# Altium PCB Layout.PcbDoc
Units mm, origin at the board's own origin, x right, y up, seen from the top; angles counter-clockwise.
Board outline 97.54 x 97.92 mm, 2 copper layers (Top Layer, Bottom Layer); 53 components, 56 nets, 252 pads, 25 vias.
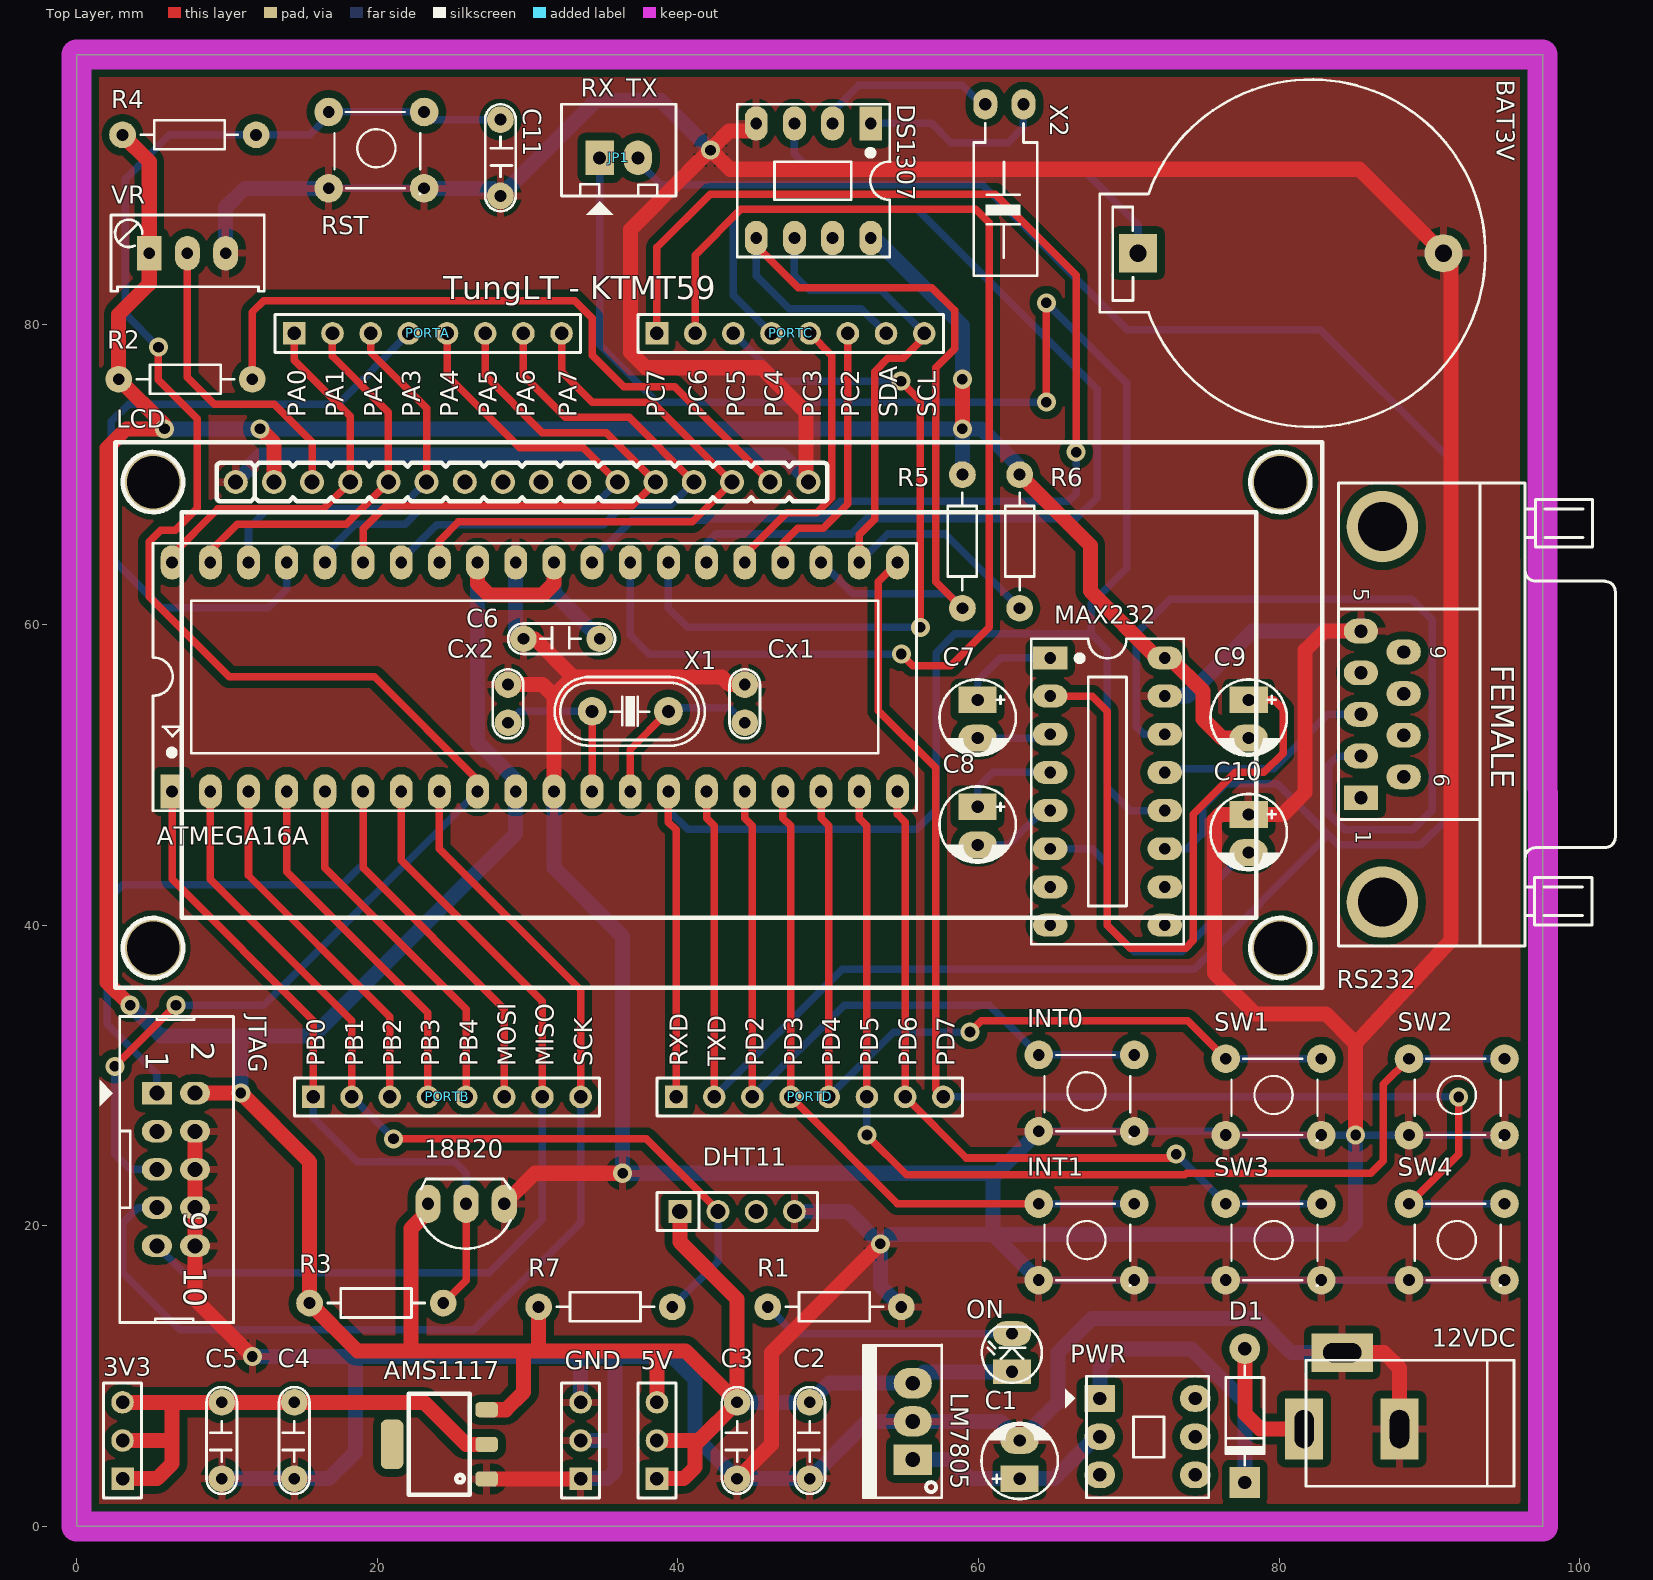
[diagram p0: Top Layer view]
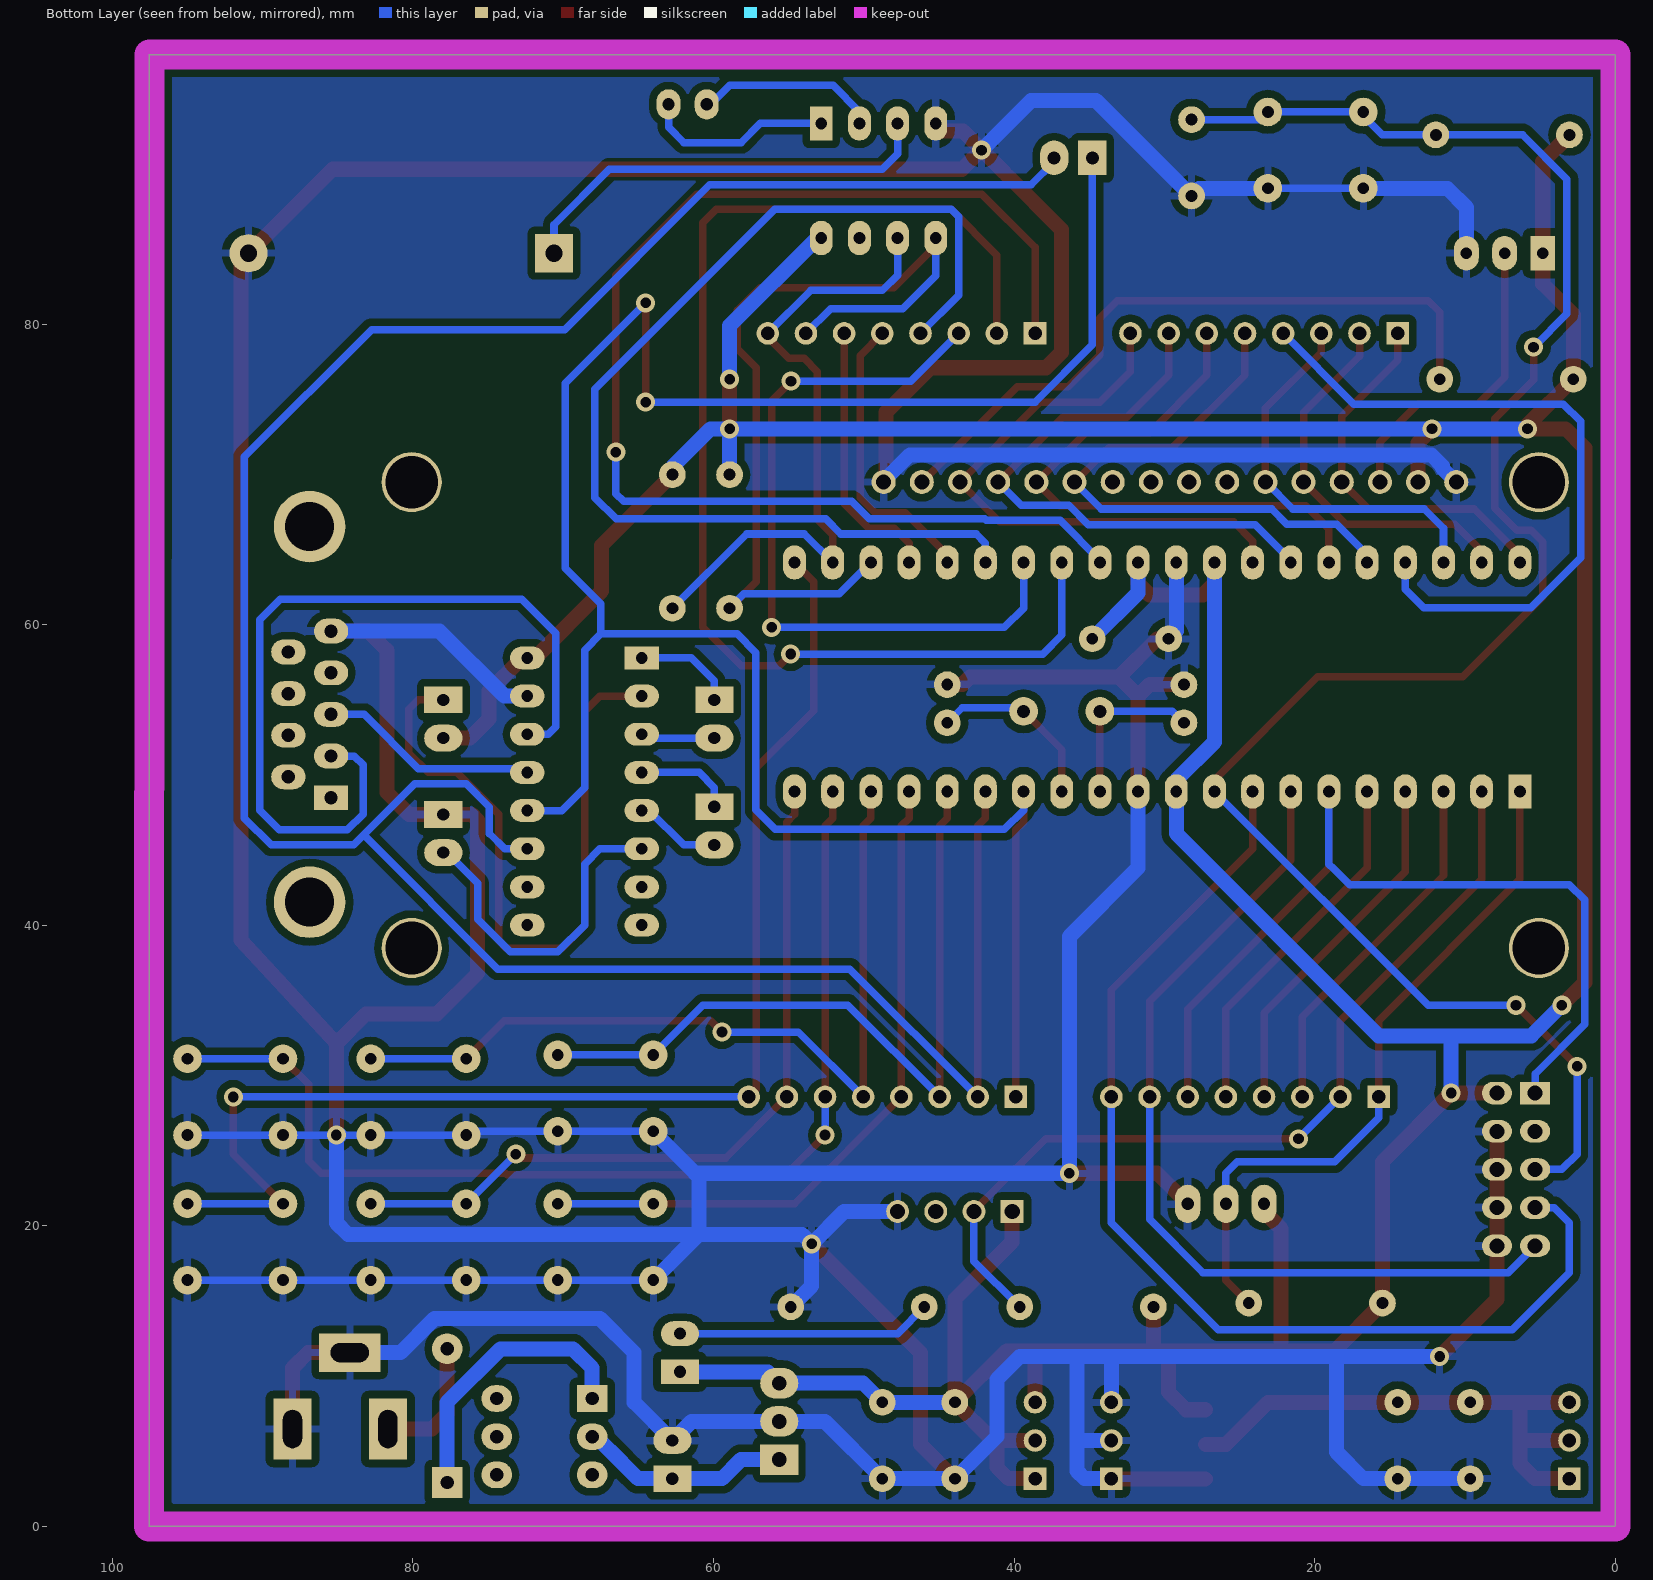
[diagram p1: Bottom Layer view, seen from below]
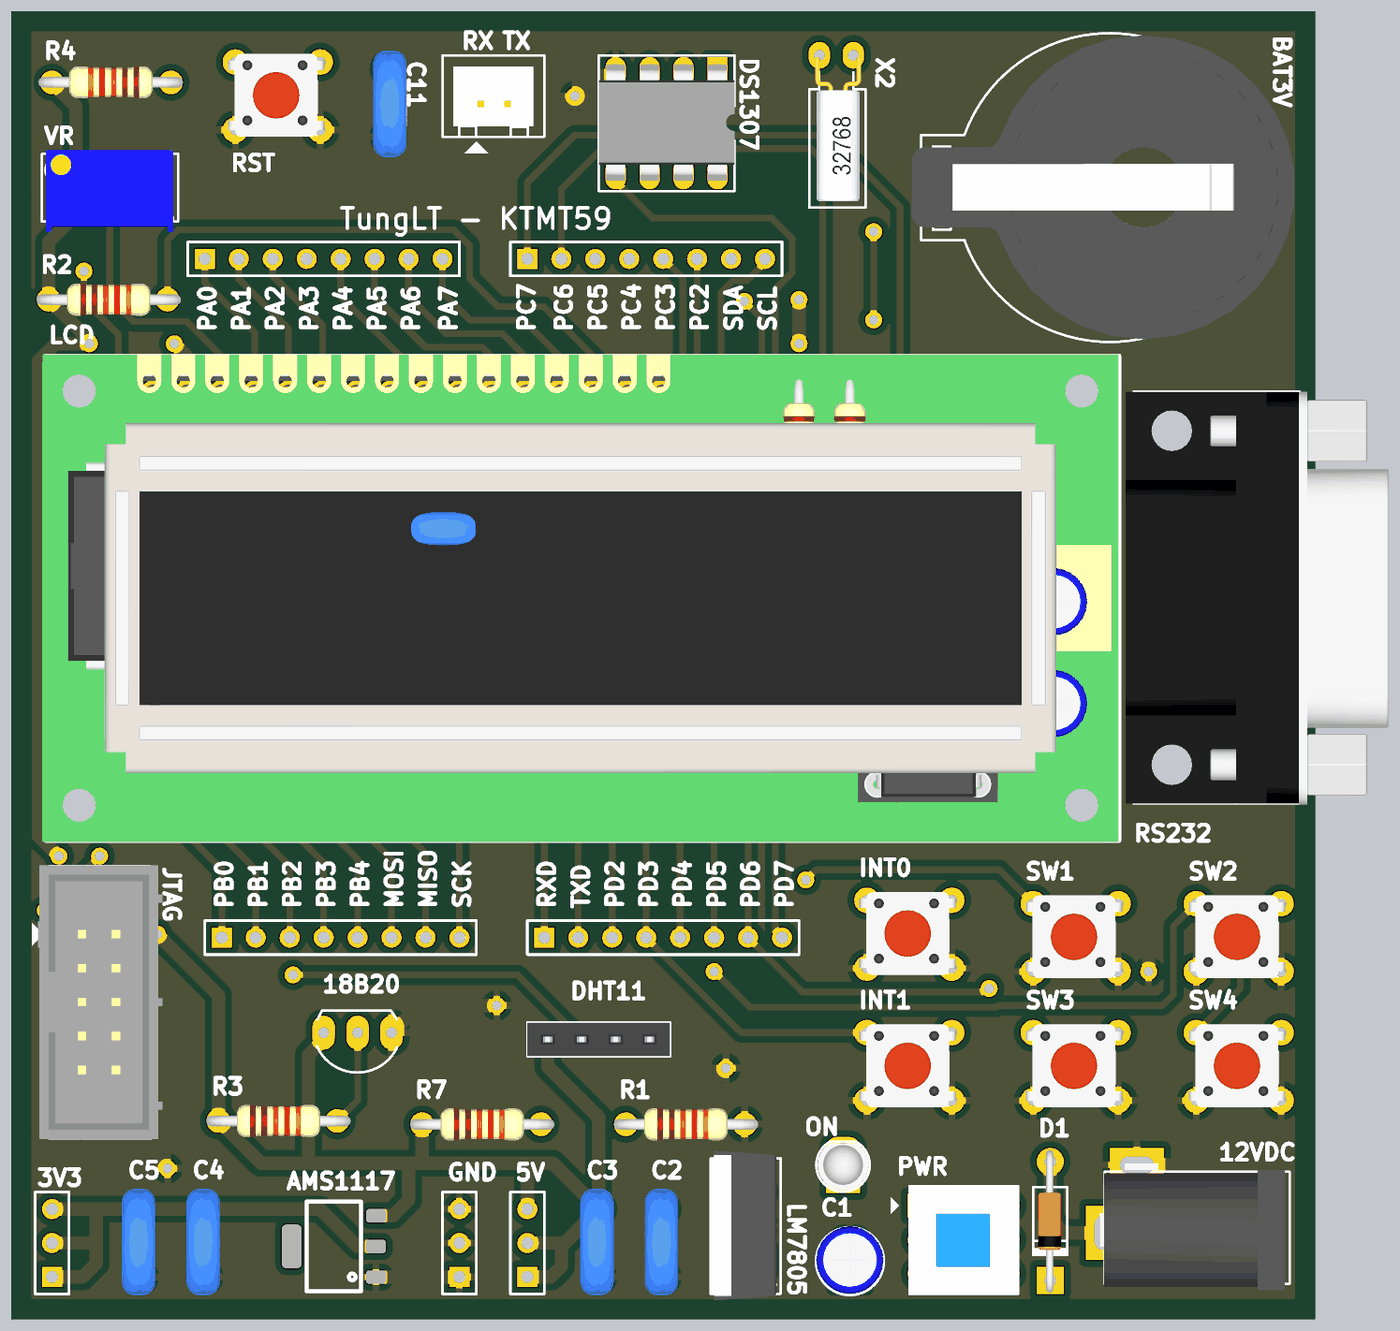
[diagram p2: 3D render of the assembled board from above, using the file's embedded part models]

## Layer stack, top to bottom
Top Solder: solder mask 0.0102, Solder Resist, Dk 3.5
Top Layer: signal copper 0.0356
Dielectric 1: dielectric 0.32, FR-4, Dk 4.8
Bottom Layer: signal copper 0.0356
Bottom Solder: solder mask 0.0102, Solder Resist, Dk 3.5

## Board outline
0,0 0,97.917 97.534,97.917 97.544,0

## Design rules (kind name [scope] priority, off if disabled: settings)
Clearance [All] p1: gap=0.5 ignorepadtopadclearanceinfootprint=FALSE
PlaneClearance [All] p1: clearance=0.5
PlaneConnect [All] p1: planeconnectstyle=Relief reliefexpansion=0.5 reliefentries=4 reliefconductorwidth=0.5 reliefairgap=0.5
PolygonConnect [All] p1: connectstyle=Relief reliefconductorwidth=0.5 reliefentries=4 polygonreliefangle="90 Angle" airgapwidth=0.5
RoutingVias [All] p1: holewidth=0.711 width=1.27 viastyle="Through Hole" minholewidth=0.711 minwidth=1.27 maxholewidth=0.711 maxwidth=1.27
SolderMaskExpansion [All] p1: expansion=0.102
Width Net_Signal [InNetClass('Net_Signal')] p1: maxlimit=1 minlimit=0.5 preferedwidth=0.5
Width Net_Power [InNetClass('Net_Power')] p2: maxlimit=2 minlimit=0.5 preferedwidth=1
28 further rules are at their usual default settings.

## Classes and differential pairs
component class Schematic: 3V3 12VDC 18B20 AMS1117 ATMEGA16A BAT3V C1 C2 C3 C4 C5 C6 C7 C8 C9 C10 C11 Cx1 Cx2 D1 DHT11 INT0 INT1 JP1 JTAG LCD LM7805 MAX232 ON PORTA PORTB PORTC PORTD PWR R1 R2 R3 R4 R5 R6 R7 RS232 RST SW1 SW2 SW3 SW4 VR X1 X2
net class Net_Power: 3V3 GND VCC
net class Net_Signal: MISO MOSI Net12VDC_1 NetBAT3V_1 NetC1_1 NetC7_1 NetC7_2 NetC8_1 NetC8_2 NetC9_1 NetC10_2 NetD1_2 NetDS1307_1 NetDS1307_2 NetLCD_3 NetLCD_15 NetMAX232_13 NetMAX232_14 NetON_2 PA0 PA1 PA2 PA3 PA4 PA5 PA6 PA7 PB0 PB1 PB2 PB3 PB4 PC2 PC3 PC4 PC5 PC6 PC7 PD2 PD3 PD4 PD5 PD6 PD7 RESET RXD SCK SCL SDA TXD XTAL1 XTAL2

## Components (designator, comment, footprint, x,y, rotation, side; value= is the part's Value field where it differs from the comment)
3V3 "Header 3" HDR1X3 3.048,3.175 r90 top
5V "Header 3" HDR1X3 38.608,3.175 r90 top
12VDC "Jac DC" DC-IN 84.836,9.017 r180 top
18B20 "DS18B20" DS18S20 25.908,21.463 r180 top
AMS1117 "AMS1117-3V3" AMS1117-3.3V 24.13,5.461 r180 top
ATMEGA16A "ATMEL 16A" DIP40/W0.6 6.35,48.895 r0 top value="Atmega 16L"
BAT3V "PIN 3V" PIN3V 70.612,84.709 r0 top (schematic designator BT1)
C1 "100uF" CP1/2 62.738,3.175 r90 top value=10uF/50V
C2 "106" CN2 48.768,3.175 r90 top value=0.1uF
C3 "104" CN2 43.942,3.175 r90 top value=0.1uF
C4 "106" CN2 14.478,3.175 r90 top value=0.1uF
C5 "104" CN2 9.652,3.175 r90 top value=0.1uF
C6 "104" CN2 29.718,59.055 r0 top value=0,1uF/300V
C7 "1uF" CP1/2 59.944,54.991 r270 top value=10uF/50V
C8 "1uF" CP1/2 59.944,47.879 r270 top value=10uF/50V
C9 "1uF" CP1/2 77.978,54.991 r270 top value=10uF/50V
C10 "1uF" CP1/2 77.978,47.371 r270 top value=10uF/50V
C11 "104" CN2 28.194,93.599 r270 top value=0.1uF
Cx1 "22pF" CN1 44.45,56.007 r270 top value=33pF
Cx2 "22pF" CN1 28.702,56.007 r270 top value=33pF
D1 "1N4007" D1A 77.724,11.811 r90 top
DHT11 "DHT11" JP4-C1T 40.132,20.955 r0 top
DS1307 "DS1307" DIP8/W0.3 52.832,93.345 r180 top
GND "Header 3" HDR1X3 33.528,3.175 r90 top
INT0 "SW" SW4 64.008,31.369 r0 top value="Button chip 4 pin"
INT1 "SW" SW4 64.008,21.463 r0 top value="Button chip 4 pin"
JP1 "JP2" CON2 34.798,91.059 r0 top value="Connector 2"
JTAG "Header 5x2" Hed2X5 5.334,28.829 r270 top
LCD "LCD 16x2A" LCD16x2 10.58,69.481 r0 top value=LCD16x2A
LM7805 "LM7805" QTO-220 55.626,4.445 r90 top
MAX232 "MAX232" DIP16/W0.3 64.77,57.785 r270 top
ON "LED" LED-3 62.23,10.287 r90 top value="LED 3 ly Single Colour"
PORTA "Header 8" HDR1X8 14.478,79.375 r0 top
PORTB "Header 8" HDR1X8 15.748,28.575 r0 top
PORTC "Header 8" HDR1X8 38.608,79.375 r0 top
PORTD "Header 8" HDR1X8 39.878,28.575 r0 top
PWR "SW6S" SW6 68.072,8.509 r0 top value=SW6
R1 "220" R1/4W 54.864,14.605 r180 top value="R1/4W - 1K"
R2 "220" R1/4W 11.684,76.327 r180 top value="R1/4W - 1K"
R3 "10k" R1/4W 24.384,14.859 r180 top value="R1/4W - 1K"
R4 "100k" R1/4W 3.048,92.583 r0 top value="R1/4W - 1K"
R5 "10k" R1/4W 58.928,61.087 r90 top value="R1/4W - 1K"
R6 "10k" R1/4W 62.738,61.087 r90 top value="R1/4W - 1K"
R7 "10k" R1/4W 39.624,14.605 r180 top value="R1/4W - 1K" (schematic designator R17)
RS232 "RS232" "DSB 9-M" 86.868,54.024 r90 top
RST "SW" SW4 16.764,94.107 r0 top value="Button chip 4 pin"
SW1 "SW" SW4 76.454,31.115 r0 top value="Button chip 4 pin"
SW2 "SW" SW4 88.646,31.115 r0 top value="Button chip 4 pin"
SW3 "SW" SW4 76.454,21.463 r0 top value="Button chip 4 pin"
SW4 "SW" SW4 88.646,21.463 r0 top value="Button chip 4 pin"
VR "10K" VR1 4.826,84.709 r0 top value="VR 10K"
X1 "16MHz" XT2 36.83,54.229 r0 top value=4Mhz
X2 "32,768 Khz" XT32-2 62.992,94.615 r270 top value=32,768khz

## Footprints (in the part's own frame and the unit in brackets; to place one, negate y for a bottom-side part, rotate by r counter-clockwise, add the part's x,y. Pads: shape width x height; smd on the part's side, far side on the other; paste and mask are expansions set on the pad)
AMS1117-3.3V [mm] "SOT223, 4-Leads, Body 6.7x7.3mm (max), Pitch 2.30mm, IPC Medium Density"
  rrect50% 1.5x1 smd: 1(-3.15,2.3) 2(-3.15,0) 3(-3.15,-2.3)
  rrect50% 1.5x3.28 smd: 4(3.15,0)
  silkscreen extent -2.03,-3.35 2.03,3.35
CN1 [mil]
  round 70 hole 31: 1(0,0) 2(100,0)
  silkscreen extent -40,-40 141,40, body extent -60,-30 170,37, height 265
CN2 [mil]
  round 70 hole 31: 1(0,0) 2(200,0)
  silkscreen extent -40,-40 240,40, body extent -54,-44 260,55, height 407
CON2 [mil] "CON2"
  rect 75x90 hole 34: 1(0,0)
  oval 75x90 hole 34: 2(100,0)
  silkscreen extent -100,-150 200,140, body extent -68,-70 168,107, height 236
CP1/2 [mil] "Tu hoa < 22uF/16>50V"
  rect 70x100 hole 32: 1(0,0)
  oval 70x100 hole 32: 2(100,0)
  silkscreen extent -53,-100 146,100, body extent -49,-99 149,99, height 287
D1A [mil] "Diode 1A, W 100mil, L 350mil"
  round 80 hole 35: 1(0,0)
  rect 80x80 hole 35: 2(-350,0)
  silkscreen extent -305,-50 -45,50, body extent -386,-33 34,36, height 84
DC-IN [mil] "Jac DC input"
  rect 100x160 hole 50 slot 100 at 90 deg: 1(125,100) 2(-125,100)
  rect 160x100 hole 50 slot 100 at 0 deg: 3(25,-100)
  silkscreen extent -425,-80 120,250, body extent -410,-105 134,269, height 434
DIP8/W0.3 [mil] "8 PIN, W 300mil, Pin to pin 100mil"
  rect 60x90 hole 31: 1(0,0)
  oval 60x90 hole 31: 2(100,0) 3(200,0) 4(300,0) 5(300,300) 6(200,300) 7(100,300) 8(0,300)
  silkscreen extent -50,-50 350,350, body extent -50,-40 350,336, height 201
DIP16/W0.3 [mil] "16 PIN, W 300mil, Pin to pin 100mil"
  rect 60x90 hole 31: 1(0,0)
  oval 60x90 hole 31: 2(100,0) 3(200,0) 4(300,0) 5(400,0) 6(500,0) 7(600,0) 8(700,0) 9(700,300) 10(600,300) 11(500,300) 12(400,300) 13(300,300) 14(200,300) 15(100,300) 16(0,300)
  silkscreen extent -50,-50 750,350, body extent -52,-57 752,356, height 299
DIP40/W0.6 [mil] "40 PIN, W 600mil, Pin to pin 100mil"
  rect 60x90 hole 31: 1(0,0)
  oval 60x90 hole 31: 2(100,0) 3(200,0) 4(300,0) 5(400,0) 6(500,0) 7(600,0) 8(700,0) 9(800,0) 10(900,0) 11(1000,0) 12(1100,0) 13(1200,0) 14(1300,0) 15(1400,0) 16(1500,0) 17(1600,0) 18(1700,0) 19(1800,0) 20(1900,0) 21(1900,600) 22(1800,600) 23(1700,600) 24(1600,600) 25(1500,600) 26(1400,600) 27(1300,600) 28(1200,600) 29(1100,600) 30(1000,600) 31(900,600) 32(800,600) 33(700,600) 34(600,600) 35(500,600) 36(400,600) 37(300,600) 38(200,600) 39(100,600) 40(0,600)
  silkscreen extent -50,-50 1950,650, body extent -82,-10 1982,600, height 224
DS18S20 [mil] "TO-92"
  oval 66x100 hole 32: 3(100,0) 4(0,0) 5(-100,0)
  silkscreen extent -117,-65 120,118
"DSB 9-M" [mil] "COM MALE D Subminiature; 9 Position; Right Angle; Pitch 1.385 mm"
  rect 65x90 hole 35: 1(-218.11,55.91)
  oval 65x90 hole 35: 2(-109.06,55.91) 3(0,55.91) 4(109.05,55.91) 5(218.11,55.91) 6(-163.58,-55.91) 7(-54.53,-55.91) 8(54.53,-55.91) 9(163.58,-55.91)
  round 187.4 hole 128.35: 10(491.93,0) 11(-491.93,0)
  silkscreen extent -606,-610 606,114, body extent -610,-637 606,138, height 495
HDR1X3 [mm] "Connector; Header; 3 Position"
  rect 1.5x1.5 hole 0.9: 1(0,0)
  round 1.5 hole 0.9: 2(2.54,0) 3(5.08,0)
  silkscreen extent -1.27,-1.27 6.35,1.27
HDR1X8 [mm] "Connector; Header; 8 Position"
  rect 1.5x1.5 hole 0.9: 1(0,0)
  round 1.5 hole 0.9: 2(2.54,0) 3(5.08,0) 4(7.62,0) 5(10.16,0) 6(12.7,0) 7(15.24,0) 8(17.78,0)
  silkscreen extent -1.27,-1.27 19.05,1.27
Hed2X5 [mm] "Header 10x2,20 pin, connecter"
  rect 1.5x2 hole 1: 1(0,0)
  oval 1.5x2 hole 1: 2(0,2.54) 3(2.54,0) 4(2.54,2.54) 5(5.08,0) 6(5.08,2.54) 7(7.62,0) 8(7.62,2.54) 9(10.16,0) 10(10.16,2.54)
  silkscreen extent -5.1,-3.81 15.29,5.11, body extent -5.17,-3.33 15.33,5.97, height 8.82
JP4-C1T [mm] "4 row, straight, gold plating"
  rect 1.52x1.52 hole 1.02: 1(0,0)
  round 1.52 hole 1.02: 2(2.54,0) 3(5.08,0) 4(7.62,0)
  silkscreen extent -1.52,-1.27 9.14,1.27, body extent -1.52,-1.25 9.14,1.25, height 8.51
LCD16x2 [mm] "LCD 16x2, 36.3mmx80.3mm"
  round 1.6 hole 1 mask+0.1: 1(0,0) 2(2.54,0) 3(5.08,0) 4(7.62,0) 5(10.16,0) 6(12.7,0) 7(15.24,0) 8(17.78,0) 9(20.32,0) 10(22.86,0) 11(25.4,0) 12(27.94,0) 13(30.48,0) 14(33.02,0) 15(35.56,0) 16(38.1,0)
  round 4 hole 3.5: Hole_0(-5.5,0) Hole_1(-5.5,-31) Hole_3(69.5,-31) Hole_4(69.5,0)
  silkscreen extent -8,-33.65 72.3,2.65, body extent -8.25,-33.75 72.25,2.75, height 10.52
LED-3 [mil] "LED 2 PIN, 3ly Only colour"
  rect 65x100 hole 32: 1(0,0)
  oval 65x100 hole 32: 2(100,0)
  silkscreen extent -29,-78 118,79, body extent -25,-75 113,75, height 217
PIN3V [mil] "Socket PIN 3V"
  rect 100x100 hole 45: 1(0,0)
  round 100 hole 45: 2(800,0)
  silkscreen extent -100,-455 910,455, body extent -128,-447 1002,449, height 278
QTO-220 [mil] "TO-220 - 1-2-3"
  rect 80x100 hole 39: 1(0,0)
  oval 80x100 hole 39: 2(100,0) 3(200,0)
  silkscreen extent -100,-76 300,130, body extent -119,-64 322,121, height 755
R1/4W [mil] "R 1/4W, 2 Pin, 350mil"
  round 70 hole 31: 1(0,0) 2(350,0)
  silkscreen extent 48,-38 302,38, body extent -40,-47 386,47, height 111
SW4 [mil] "SW button 4pin, 250 x250 mil"
  round 75 hole 31: 1(0,0) 2(250,-200) 3(250,0) 4(0,-200)
  silkscreen extent 15,-215 240,0, body extent -36,-220 276,24, height 276
SW6 [mil] "SW DTDP - 6Pin 260x300x300 mil"
  rect 80x70 hole 35: 1(0,0)
  oval 80x70 hole 35: 2(0,-100) 3(0,-200) 4(250,-200) 5(250,-100) 6(250,0)
  silkscreen extent -90,-260 285,58, body extent -33,-259 281,55, height 532
VR1 [mil] "Variable Resistor"
  rect 65x90 hole 30: 1(0,0)
  oval 65x90 hole 30: 2(100,0) 3(200,0)
  silkscreen extent -100,-100 301,100, body extent -88,-130 288,110, height 455
XT2 [mil] "Footpin for Crystal 2 pin"
  round 75 hole 34: 1(-100,0) 2(100,0)
  silkscreen extent -198,-90 195,90, body extent -233,-93 213,90, height 138
XT32-2 [mm] "Crystal 32k, 2 pin, real timer for DS1307"
  oval 2x1.6 hole 0.813: 1(0,0) 2(0,-2.54)
  silkscreen extent 1.27,-3.3 11.4,0.91, body extent 0.15,-2.87 10.92,0.58, height 3.4

## Part data
3V3 5V GND: library part Hed3, "Header 3 (Green)"
12VDC: library part DCIN, "Jac DC input"
18B20: library part DS18S20, "High Precision  1-Wire® Digital Thermometer"
AMS1117: "Linear Voltage Regulator 3.3V 1A 15V Max SOT-223", ComponentLink1Description=Datasheet, ComponentLink1URL="D:\Dropbox\Datasheets\Power Management ICs\Linear Regulators\AMS1117.pdf", Unit Price=0.2000
ATMEGA16A: library part ATmega16A-PU, "8-Bit AVR Microcontroller with 16K Bytes of In-System Programmable Flash Memory"
BAT3V: "Battery 3VDC"
C1 C7 C8 C9 C10: library part CP1, "Cap P  0,1uF < 22uF , 16 - 50V", Description 1="10 => 220uF/6,3V/10V - 10uF => 100uF/16V", Description 2="0,1uF => 33uF/50V - 10uF => 22uF/63V", Description 3="0,47uF => 10uF/100V"
C2 C3 C4 C5 C11: library part CN2, "Cap np 104 => 105pF"
C6: library part CN, Designed by=VanDungEvn
Cx1 Cx2: library part CN0, "Cremic For Xtal 1pF => 100pF"
D1: library part D1A, "Diode 1A"
DHT11: Manufacturer="Würth Elektronik eiSos GmbH", partNo=613004143121, ComponentLink1 Description=Manufacturer, ComponentLink1URL=http://www.we-online.com, ComponentLink2 Description=Datasheet, ComponentLink2URL=http://katalog.we-online.de/em/datasheet/6130xx143121.pdf, Created by="Karrer Zheng", Created Date="29 March 2013", NoPins=04
DS1307: "Real Timer Serial"
INT0 INT1 RST SW1 SW2 SW3 SW4: library part SW4, "Switch button 4 pin"
JP1: library part Con2, "Connector 2"
JTAG: library part HED5x2
LCD: library part LCD16x2A, "LCD dipslay 16 char, 2 line"
LM7805: library part LM78xx, "On ap +, from + 5 to + 24VDC", =LM7808
MAX232: "Dual EIA-232 Driver/Receiver"
ON: "LED Single colour Green and Red"
PORTA PORTB PORTC PORTD: library part HED8V, "Header 8 Vit Broad"
PWR: "SW-DTDP - 6 Pin"
R1 R2 R3 R4 R5 R6 R7: library part R1/4W, "Resistor 1/4W"
RS232: library part COM
VR: library part VR, "Var Resistor"
X1: library part XT2, "Crystal For all Crystal 2pin."
X2: library part XT32k, "Crystal 32,768kHz for timer real"

## Via types
v1: diameter 1.27, hole 0.711, Top Layer to Bottom Layer, 25 vias

## Nets (pads, with @x,y where several pads share a name; then routed paths per layer and width w, separated by ;. In a path a pad name is that pad's centre, name@x,y a point inside that pad or via, vN(x,y) a via of type N, cw(c..) or ccw(c..) an arc to the next point about the centre after c; other vN are vias at no path point)
3V3: 3V3.1 3V3.2 3V3.3 AMS1117.2 C4.2 C5.2 | length 36.5
  Top Layer w1: 3V3.1 5.334,3.175 6.35,4.191 6.35,5.715 ; 3V3.2 6.35,5.715 ; 3V3.3 6.35,8.255 ; AMS1117.2 25.908,5.461 23.114,8.255 C4.2 C5.2 6.35,8.255 ; 6.35,5.715 6.35,8.255
GND: 12VDC.2 12VDC.3 18B20.5 AMS1117.1 ATMEGA16A.11 ATMEGA16A.31 BAT3V.2 C1.2 C2.1 C3.1 C4.1 C5.1 C6.1 C10.1 C11.2 Cx1.1 Cx2.1 DHT11.4 DS1307.4 GND.1 GND.2 GND.3 INT0.2 INT0.4 INT1.2 INT1.4 JTAG.4 JTAG.6 JTAG.8 JTAG.10 LCD.1 LCD.16 LM7805.2 MAX232.15 R1.1 RS232.5 RST.2 RST.4 SW1.2 SW1.4 SW2.2 SW2.4 SW3.2 SW3.4 SW4.2 SW4.4 VR.3 | length 674.8
  Top Layer w1: JTAG.4 JTAG.6 JTAG.8 JTAG.10 7.874,15.113 v1(11.684,11.303) ; AMS1117.1 33.514,3.161 GND.1 ; 18B20.5 30.48,23.495 v1(36.322,23.495) ; Cx2.1 30.988,56.007 31.75,55.245 ; C6.1 30.48,59.055 33.02,56.515 ; ATMEGA16A.11 31.75,55.245 ; 40.458,89.891 36.855,86.288 36.855,78.105 37.871,77.089 45.554,77.089 48.514,74.129 48.514,69.647 LCD.16 ; 40.64,90.073 v1@42.164,91.597 ; C3.1 46.228,5.461 46.228,11.557 v1(53.467,18.796) ; Cx1.1 43.434,56.007 42.926,56.515 33.02,56.515 ; DS1307.4 45.212,92.837 43.404,92.837 v1@42.164,91.597 ; 12VDC.3 86.995,11.557 88.011,10.541 12VDC.2 ; v1(85.09,26.035) 85.09,32.131 ; RS232.5@86.03,59.564 RS232.5 83.008,59.564 81.737,58.293 81.737,48.844 80.264,47.371 C10.1 76.073,47.371 75.692,46.99 75.692,36.805 78.41,34.087 83.134,34.087 85.09,32.131 ; 31.75,55.245 33.02,56.515 ; v1@42.164,91.597 43.464,90.297 85.344,90.297 BAT3V.2 91.44,84.201 91.44,38.989 85.09,32.131
  Bottom Layer w0.5: RST.4 RST.2 ; INT1.4 INT1.2 SW3.4 SW3.2 SW4.4 SW4.2 ; INT0.4 INT0.2 76.2,26.289 SW1.4 SW1.2 84.836,26.035 v1(85.09,26.035) SW2.4 SW2.2
  Bottom Layer w1: C5.1 C4.1 16.764,3.175 18.542,4.953 18.542,11.303 ; VR.3 9.906,87.757 11.176,89.027 RST.4 ; LCD.1 11.506,70.407 11.506,70.561 12.243,71.298 46.939,71.298 48.768,69.469 LCD.16 ; v1(11.684,11.303) 18.542,11.303 ; RST.2 27.686,89.027 C11.2 34.544,94.869 38.862,94.869 v1(42.164,91.567) ; ATMEGA16A.31 29.21,59.563 C6.1 ; ATMEGA16A.11 31.75,43.815 36.322,39.243 v1(36.322,23.495) 60.96,23.495 ; GND.1 35.306,3.175 35.814,3.683 35.814,5.715 ; GND.2 35.814,5.715 ; GND.3 33.528,11.303 ; DS1307.4@45.212,93.218 DS1307.4 ; DHT11.4 51.308,20.955 v1(53.467,18.796) ; R1.1 53.467,16.002 v1(53.467,18.796) ; INT1.4 60.96,19.431 ; INT0.4 61.214,23.495 ; MAX232.15 73.914,55.245 78.233,59.564 RS232.5 ; 12VDC.3 80.829,11.557 78.559,13.827 67.548,13.827 65.278,11.557 65.278,8.255 C1.2 61.468,6.985 LM7805.2 52.578,6.985 C2.1 C3.1 41.148,5.969 41.148,9.779 39.624,11.303 35.814,11.303 ; v1@84.836,26.035 85.09,25.781 85.09,20.193 84.328,19.431 60.96,19.431 ; 18.542,11.303 33.528,11.303 ; 33.528,11.303 35.814,11.303 ; 35.814,5.715 35.814,11.303 ; v1(53.467,18.796) 54.102,19.431 60.96,19.431 ; 60.96,19.431 60.96,23.241 ; 60.96,23.241 60.96,23.495 ; 60.96,23.241 61.214,23.495 ; 60.96,23.495 61.214,23.495 ; 60.96,23.495 60.971,23.505 61.214,23.495
MISO: ATMEGA16A.7 JTAG.9 PORTB.7 | length 60.2
  Top Layer w0.5: ATMEGA16A.7 21.59,44.323 30.988,34.925 PORTB.7
  Bottom Layer w0.5: JTAG.9 7.112,16.891 27.432,16.891 30.988,20.447 PORTB.7
MOSI: ATMEGA16A.6 JTAG.1 PORTB.6 | length 61.3
  Top Layer w0.5: ATMEGA16A.6 19.05,43.815 28.448,34.417 PORTB.6
  Bottom Layer w0.5: JTAG.1 5.334,30.099 2.032,33.401 2.032,41.275 2.032,41.681 3.048,42.697 17.678,42.697 18.734,43.753 19.05,44.069 ATMEGA16A.6
Net12VDC_1: 12VDC.1 D1.1 | length 8.7
  Top Layer w1: D1.1 77.724,7.493 78.74,6.477 12VDC.1
NetBAT3V_1: BAT3V.1 DS1307.3 | length 28.7
  Bottom Layer w0.5: DS1307.3 47.752,91.313 48.768,90.297 66.929,90.297 70.612,86.614 BAT3V.1
NetC1_1: C1.1 LM7805.1 PWR.2 | length 14.1
  Bottom Layer w1: LM7805.1 58.166,4.445 59.436,3.175 C1.1 65.024,3.175 66.056,4.207 66.056,4.211 67.814,5.969 PWR.2
NetC7_1: C7.1 MAX232.1 | length 6.7
  Bottom Layer w0.5: C7.1 59.944,56.261 61.468,57.785 MAX232.1
NetC7_2: C7.2 MAX232.3 | length 4.9
  Bottom Layer w0.5: C7.2 64.516,52.451 MAX232.3
NetC8_1: C8.1 MAX232.4 | length 6.5
  Bottom Layer w0.5: C8.1 59.944,49.149 60.96,50.165 MAX232.4
NetC8_2: C8.2 MAX232.5 | length 5.8
  Bottom Layer w0.5: C8.2 61.976,45.339 64.262,47.625 MAX232.5
NetC9_1: C9.1 MAX232.2 | length 46.5
  Top Layer w0.5: MAX232.2 67.564,55.245 68.58,54.229 68.58,40.005 70.104,38.481 73.787,38.481 74.295,38.989 74.295,47.371 77.089,50.165 78.994,50.165 80.264,51.435 80.264,54.356 79.629,54.991 C9.1
NetC10_2: C10.2 MAX232.6 | length 22.6
  Bottom Layer w0.5: MAX232.6 67.564,45.085 68.58,44.069 68.58,40.005 70.358,38.227 73.533,38.227 75.692,40.386 75.692,42.799 77.724,44.831 C10.2
NetD1_2: D1.2 PWR.1 | length 19
  Bottom Layer w1: PWR.1 68.072,10.541 69.342,11.811 74.168,11.811 77.724,8.255 D1.2
NetDS1307_1: DS1307.1 X2.1 | length 12.6
  Bottom Layer w0.5: DS1307.1 56.896,93.345 58.166,92.075 61.976,92.075 62.992,93.091 X2.1
NetDS1307_2: DS1307.2 X2.2 | length 12.2
  Bottom Layer w0.5: DS1307.2 50.292,94.135 52.042,95.885 58.928,95.885 60.198,94.615 X2.2
NetLCD_3: LCD.3 VR.2 | length 21
  Top Layer w0.5: VR.2 7.366,76.454 9.144,74.676 13.132,74.676 15.66,72.148 LCD.3
NetLCD_15: LCD.15 R2.1 | length 45.7
  Top Layer w0.5: R2.1 11.684,80.797 12.446,81.559 33.122,81.559 34.29,80.391 34.29,77.927 36.398,75.819 39.802,75.819 LCD.15
NetMAX232_13: MAX232.13 RS232.3 | length 14.7
  Bottom Layer w0.5: MAX232.13 72.644,50.419 79.629,50.419 83.234,54.024 RS232.3
NetMAX232_14: MAX232.14 RS232.2 | length 55.7
  Bottom Layer w0.5: MAX232.14 70.993,52.705 70.485,53.213 70.485,59.436 72.746,61.697 88.824,61.697 90.195,60.325 90.195,47.65 88.9,46.355 84.353,46.355 83.312,47.396 83.312,50.673 83.893,51.254 RS232.2
NetON_2: ON.2 R1.2 | length 17
  Bottom Layer w0.5: R1.2 47.752,12.827 ON.2
PA0: ATMEGA16A.40 LCD.4 PORTA.1 | length 25.8
  Top Layer w0.5: ATMEGA16A.40 6.35,64.643 9.398,67.691 16.41,67.691 LCD.4 18.2,73.875 14.478,77.597 PORTA.1
PA1: ATMEGA16A.39 LCD.5 PORTA.2 | length 25.9
  Top Layer w0.5: ATMEGA16A.39 8.89,64.897 10.668,66.675 17.934,66.675 LCD.5 20.74,74.129 17.018,77.851 PORTA.2
PA2: ATMEGA16A.38 LCD.6 PORTA.3 | length 26.8
  Top Layer w0.5: PORTA.3 19.558,78.105 23.28,74.383 LCD.6
  Bottom Layer w0.5: ATMEGA16A.38 11.43,66.421 12.7,67.691 21.446,67.691 23.236,69.481 LCD.6
PA3: ATMEGA16A.37 PORTA.4 | length 46.6
  Bottom Layer w0.5: ATMEGA16A.37 13.97,62.357 12.74,61.127 5.624,61.127 2.311,64.44 2.311,73.533 3.454,74.676 17.399,74.676 PORTA.4
PA4: ATMEGA16A.36 LCD.11 PORTA.5 | length 39.1
  Top Layer w0.5: PORTA.5 24.638,76.581 29.464,71.755 33.706,71.755 LCD.11
  Bottom Layer w0.5: ATMEGA16A.36 16.51,64.643 18.542,66.675 21.844,66.675 22.86,67.691 34.19,67.691 LCD.11
PA5: ATMEGA16A.35 LCD.12 PORTA.6 | length 40.1
  Top Layer w0.5: ATMEGA16A.35 19.05,66.37 20.599,67.92 36.959,67.92 LCD.12 35.23,72.771 30.988,72.771 27.178,76.581 PORTA.6
PA6: ATMEGA16A.34 LCD.13 PORTA.7 | length 38.9
  Top Layer w0.5: PORTA.7 29.718,76.581 32.512,73.787 36.754,73.787 LCD.13
  Bottom Layer w0.5: ATMEGA16A.34 21.59,64.287 23.952,66.65 35.066,66.65 36.347,67.931 39.51,67.931 LCD.13
PA7: ATMEGA16A.33 LCD.14 PORTA.8 | length 39.4
  Top Layer w0.5: ATMEGA16A.33 24.13,65.557 25.4,66.827 40.946,66.827 LCD.14 38.278,74.803 34.29,74.803 32.258,76.835 PORTA.8
PB0: 18B20.4 ATMEGA16A.1 PORTB.1 R3.1 | length 46.6
  Top Layer w0.5: ATMEGA16A.1 6.35,43.053 15.748,33.655 PORTB.1 ; R3.1 25.908,16.383 18B20.4
  Bottom Layer w0.5: PORTB.1 15.748,27.178 18.669,24.257 25.146,24.257 25.908,23.495 18B20.4
PB1: ATMEGA16A.2 DHT11.2 PORTB.2 R7.1 | length 59.4
  Top Layer w0.5: ATMEGA16A.2 8.89,43.053 18.288,33.655 PORTB.2 ; v1(21.082,25.781) 37.887,25.781 42.672,20.996 DHT11.2
  Bottom Layer w0.5: PORTB.2 v1(21.082,25.781) ; R7.1 42.672,17.653 DHT11.2
PB2: ATMEGA16A.3 PORTB.3 | length 24.2
  Top Layer w0.5: ATMEGA16A.3 11.43,43.307 20.828,33.909 PORTB.3
PB3: ATMEGA16A.4 PORTB.4 | length 24.2
  Top Layer w0.5: ATMEGA16A.4 13.97,43.561 23.368,34.163 PORTB.4
PB4: ATMEGA16A.5 PORTB.5 | length 24.2
  Top Layer w0.5: ATMEGA16A.5 16.51,43.815 25.908,34.417 PORTB.5
PC2: ATMEGA16A.24 PORTC.6 | length 18
  Top Layer w0.5: ATMEGA16A.24 46.99,65.405 47.981,66.396 49.679,66.396 51.308,68.025 PORTC.6
PC3: ATMEGA16A.25 PORTC.5 | length 19.4
  Top Layer w0.5: ATMEGA16A.25 44.45,64.643 47.244,67.437 49.225,67.437 50.241,68.453 50.241,77.902 PORTC.5
PC4: ATMEGA16A.26 PORTC.4 | length 73.9
  Bottom Layer w0.5: ATMEGA16A.26 41.91,65.405 42.533,66.028 51.525,66.028 52.527,67.031 66.472,67.031 67.894,68.453 67.894,75.667 55.931,87.63 44.196,87.63 43.688,87.122 43.688,81.915 PORTC.4
PC5: ATMEGA16A.27 PORTC.3 | length 49.7
  Top Layer w0.5: v1(54.839,76.2) 56.134,74.905 v1(56.134,59.817)
  Bottom Layer w0.5: ATMEGA16A.27 39.37,61.087 40.64,59.817 v1(56.134,59.817) ; PORTC.3 46.863,76.2 v1(54.839,76.2)
PC6: ATMEGA16A.28 PORTC.2 | length 83.9
  Top Layer w0.5: PORTC.2 41.148,84.582 44.196,87.63 59.817,87.63 60.706,86.741 60.706,59.817 58.166,57.277 55.626,57.277 v1(54.864,58.039)
  Bottom Layer w0.5: ATMEGA16A.28 36.83,59.309 38.1,58.039 v1(54.864,58.039)
PC7: ATMEGA16A.29 PORTC.1 | length 86
  Top Layer w0.5: PORTC.1 38.608,85.099 42.139,88.63 61.103,88.63 66.497,83.236 v1(66.497,71.476)
  Bottom Layer w0.5: ATMEGA16A.29 34.29,64.29 36.929,66.929 41.839,66.929 41.938,67.028 49.629,67.028 50.8,68.199 65.977,68.199 66.497,68.719 v1(66.497,71.476)
PD2: ATMEGA16A.16 INT0.1 INT0.3 PORTD.3 | length 49.8
  Top Layer w0.5: ATMEGA16A.16 44.45,47.117 44.958,46.609 PORTD.3
  Bottom Layer w0.5: PORTD.3 51.054,34.671 60.706,34.671 INT0.1 INT0.3
PD3: ATMEGA16A.17 INT1.1 INT1.3 PORTD.4 | length 46.3
  Top Layer w0.5: ATMEGA16A.17 46.99,47.117 47.498,46.609 PORTD.4 54.61,21.463 INT1.1
  Bottom Layer w0.5: INT1.1 INT1.3
PD4: ATMEGA16A.18 PORTD.5 SW1.1 SW1.3 | length 56.5
  Top Layer w0.5: ATMEGA16A.18 49.53,47.117 50.038,46.609 PORTD.5 ; v1(59.436,32.893) 60.198,33.655 73.914,33.655 SW1.1
  Bottom Layer w0.5: PORTD.5 54.356,32.893 v1(59.436,32.893) ; SW1.1 SW1.3
PD5: ATMEGA16A.19 PORTD.6 SW2.1 SW2.3 | length 72.8
  Top Layer w0.5: ATMEGA16A.19 52.07,47.117 52.578,46.609 PORTD.6 ; v1(52.578,26.035) 55.233,23.38 73.726,23.38 73.841,23.495 86.106,23.495 86.943,24.332 86.943,29.412 SW2.1
  Bottom Layer w0.5: v1(52.578,26.035) PORTD.6 ; SW2.1 SW2.3
PD6: ATMEGA16A.20 PORTD.7 SW3.1 SW3.3 | length 51.4
  Top Layer w0.5: ATMEGA16A.20 54.61,47.371 55.118,46.863 PORTD.7 59.182,24.511 72.898,24.511 v1(73.152,24.765)
  Bottom Layer w0.5: v1(73.152,24.765) SW3.1 SW3.3
PD7: ATMEGA16A.21 PORTD.8 SW4.1 SW4.3 | length 87
  Top Layer w0.5: ATMEGA16A.21 53.34,62.865 53.34,54.28 57.15,50.47 57.15,29.083 PORTD.8 ; SW4.1 91.948,24.765 v1(91.948,28.575)
  Bottom Layer w0.5: PORTD.8 v1(91.948,28.575) ; SW4.1 SW4.3
RESET: ATMEGA16A.9 C11.1 JTAG.5 R4.2 RST.1 RST.3 | length 127.3
  Top Layer w0.5: v1(2.54,30.607) v1(6.604,34.671) ; v1(5.436,78.461) 5.436,76.276 8.028,73.684 8.028,67.736 6.561,66.269 5.588,66.269 4.826,65.507 4.826,61.849 10.16,56.515 19.812,56.515 26.67,49.657 ATMEGA16A.9
  Bottom Layer w0.5: v1(2.54,30.607) 2.54,24.765 3.556,23.749 JTAG.5 ; v1(5.436,78.461) 3.226,80.67 3.226,89.637 6.172,92.583 R4.2 15.494,92.583 16.764,93.853 RST.1 RST.3 23.622,93.599 C11.1 ; v1(6.604,34.671) 12.446,34.671 ATMEGA16A.9
RXD: ATMEGA16A.14 JP1.1 MAX232.12 PORTD.1 | length 152.6
  Top Layer w0.5: ATMEGA16A.14 39.37,46.863 39.878,46.355 PORTD.1 ; v1(64.516,74.803) v1(64.516,81.407)
  Bottom Layer w0.5: JP1.1 34.798,78.613 38.608,74.803 v1(64.516,74.803) ; ATMEGA16A.14 39.37,47.65 40.64,46.38 55.88,46.38 57.175,47.676 57.175,58.141 58.42,59.385 67.488,59.385 ; v1(64.516,81.407) 69.85,76.073 69.85,63.754 67.488,61.392 67.488,59.385 ; MAX232.12 70.104,47.625 68.58,49.149 68.58,58.293 67.488,59.385
SCK: ATMEGA16A.8 JTAG.7 PORTB.8 | length 73.6
  Top Layer w0.5: ATMEGA16A.8 24.13,45.085 33.528,35.687 PORTB.8
  Bottom Layer w0.5: JTAG.7 4.064,21.209 3.048,20.193 3.048,16.891 6.858,13.081 26.416,13.081 33.528,20.193 PORTB.8
SCL: ATMEGA16A.22 DS1307.6 PORTC.8 R6.1 | length 43.8
  Top Layer w0.5: ATMEGA16A.22 52.07,65.989 53.086,67.005 53.086,76.835 53.975,77.724 54.991,77.724 56.388,79.121 PORTC.8
  Bottom Layer w0.5: DS1307.6 47.752,83.246 48.768,82.23 53.533,82.23 PORTC.8 ; ATMEGA16A.22 53.963,66.028 57.797,66.028 R6.1
SDA: ATMEGA16A.23 DS1307.5 PORTC.7 R5.1 | length 60
  Top Layer w0.5: DS1307.5 45.212,85.217 48.006,82.423 56.896,82.423 58.42,80.899 58.42,78.359 57.15,77.089 57.15,62.865 R5.1
  Bottom Layer w0.5: DS1307.5 45.212,83.213 47.399,81.026 52.197,81.026 PORTC.7 ; ATMEGA16A.23 51.625,62.04 57.975,62.04 R5.1
TXD: ATMEGA16A.15 JP1.2 MAX232.11 PORTD.2 | length 179
  Top Layer w0.5: ATMEGA16A.15 41.91,47.117 42.418,46.609 PORTD.2
  Bottom Layer w0.5: JP1.2 37.338,90.805 38.862,89.281 60.253,89.281 69.905,79.629 82.753,79.629 91.211,71.171 91.211,47.117 89.433,45.339 83.947,45.339 83.274,46.012 ; PORTD.2 50.927,37.084 74.346,37.084 83.274,46.012 ; MAX232.11 73.889,45.085 74.905,46.101 74.905,47.854 76.454,49.403 79.883,49.403 83.274,46.012
VCC: 5V.1 5V.2 5V.3 18B20.3 AMS1117.3 ATMEGA16A.10 ATMEGA16A.30 ATMEGA16A.32 C2.2 C3.2 C6.2 C9.2 DHT11.1 DS1307.8 JTAG.2 LCD.2 LM7805.3 MAX232.16 ON.1 R2.2 R3.2 R4.1 R5.2 R6.2 R7.2 VR.1 | length 357.4
  Top Layer w1: R4.1 4.826,90.805 VR.1 4.826,82.677 2.794,80.645 R2.2 5.842,73.279 v1(5.842,73.025) 3.302,73.025 2.032,71.755 2.032,36.195 v1(3.556,34.671) ; JTAG.2 v1(10.922,28.829) 15.494,24.257 R3.2 18.669,11.684 22.352,11.684 ; v1(12.192,73.025) 13.12,72.097 LCD.2 ; 18B20.3 23.368,20.955 22.241,19.828 22.241,11.795 22.352,11.684 ; ATMEGA16A.32 26.67,62.738 27.432,61.976 30.988,61.976 31.75,62.738 ATMEGA16A.30 ; AMS1117.3 28.55,7.761 29.718,8.929 29.718,11.684 ; R7.2 30.734,11.684 ; 5V.1 40.386,3.175 41.148,3.937 41.148,5.461 41.402,5.715 ; 5V.2 41.402,5.715 ; 5V.3 38.608,11.684 ; DHT11.1 40.132,18.923 43.942,15.113 C3.2 ; v1(58.928,73.025) v1(58.928,76.327) ; R6.2 67.437,65.278 67.437,62.23 71.882,57.785 MAX232.16 72.723,57.785 74.93,55.578 74.93,53.721 76.2,52.451 C9.2 ; 22.352,11.684 29.718,11.684 ; 29.718,11.684 30.734,11.684 ; 30.734,11.684 38.608,11.684 ; 38.608,11.684 40.513,11.684 C3.2 ; 41.402,5.715 C3.2
  Bottom Layer w1: v1(3.556,34.671) 5.588,32.639 10.922,32.639 ; v1(5.842,73.025) v1(12.192,73.025) v1(58.928,73.025) ; v1(10.922,28.829) 10.922,32.639 ; ATMEGA16A.32 26.67,52.197 29.21,49.657 ATMEGA16A.10 29.21,46.101 15.748,32.639 10.922,32.639 ; ATMEGA16A.30 31.75,62.103 C6.2 ; C3.2 C2.2 50.038,9.525 LM7805.3 56.388,10.287 ON.1 ; DS1307.8 53.086,85.725 58.928,79.883 v1(58.928,76.327) ; R5.2 v1(58.928,73.025) ; R6.2 62.738,70.485 60.198,73.025 v1(58.928,73.025)
XTAL1: ATMEGA16A.13 Cx1.2 X1.2 | length 12
  Top Layer w0.5: ATMEGA16A.13 36.83,51.689 X1.2
  Bottom Layer w0.5: X1.2 39.624,54.483 43.434,54.483 Cx1.2
XTAL2: ATMEGA16A.12 Cx2.2 X1.1 | length 11.2
  Top Layer w0.5: ATMEGA16A.12 X1.1
  Bottom Layer w0.5: Cx2.2 29.464,54.229 X1.1
"": 
pads on no net: AMS1117.4 DHT11.3 DS1307.7 JTAG.3 LCD.7 LCD.8 LCD.9 LCD.10 LCD.Hole_0 LCD.Hole_1 LCD.Hole_3 LCD.Hole_4 MAX232.7 MAX232.8 MAX232.9 MAX232.10 PWR.3 PWR.4 PWR.5 PWR.6 RS232.1 RS232.4 RS232.6 RS232.7 RS232.8 RS232.9 RS232.10 RS232.11

## Polygon pours and split planes (outlines as drawn)
GND on Bottom Layer "Bottom Layer-No Net" (solid, remove dead copper, pour order 2): 0,97.663 0,0 97.544,0 97.544,97.907 97.534,97.917 0.254,97.917
GND on Top Layer "Top Overlay-No Net" (solid, remove dead copper, pour order 0): 0,97.917 0,0.381 0.381,0 97.544,0 97.544,97.655 97.282,97.917

## Keep-outs
Keep-Out Layer:
  the board outline again, w2

## Silkscreen, mask and mechanical layers (free items; w line width, h text height)
Top Overlay:
  text "RX" at 33.528,95.123 h1.2
  text "TX" at 36.576,95.123 h1.2
  text "TungLT - KTMT59" at 24.384,81.661 h1.52
  text "PA0" at 15.24,73.787 h1.2 r90
  text "PA1" at 17.78,73.787 h1.2 r90
  text "PA2" at 20.32,73.787 h1.2 r90
  text "PA3" at 22.86,73.787 h1.2 r90
  text "PA4" at 25.4,73.787 h1.2 r90
  text "PA5" at 27.94,73.787 h1.2 r90
  text "PA6" at 30.48,73.787 h1.2 r90
  text "PA7" at 33.274,73.787 h1.2 r90
  text "PC7" at 39.116,73.787 h1.2 r90
  text "PC6" at 41.91,73.787 h1.2 r90
  text "PC5" at 44.45,73.787 h1.2 r90
  text "PC4" at 46.99,73.787 h1.2 r90
  text "PC3" at 49.53,73.787 h1.2 r90
  text "PC2" at 52.07,73.787 h1.2 r90
  text "SDA" at 54.61,73.787 h1.2 r90
  text "SCL" at 57.15,73.787 h1.2 r90
  text "PB0" at 16.51,30.607 h1.2 r90
  text "PB1" at 19.05,30.607 h1.2 r90
  text "PB2" at 21.59,30.607 h1.2 r90
  text "PB3" at 24.13,30.607 h1.2 r90
  text "PB4" at 26.67,30.607 h1.2 r90
  text "MOSI" at 29.21,30.607 h1.2 r90
  text "MISO" at 31.75,30.607 h1.2 r90
  text "SCK" at 34.29,30.607 h1.2 r90
  text "RXD" at 40.64,30.607 h1.2 r90
  text "TXD" at 43.18,30.607 h1.2 r90
  text "PD2" at 45.72,30.607 h1.2 r90
  text "PD3" at 48.26,30.607 h1.2 r90
  text "PD4" at 50.8,30.607 h1.2 r90
  text "PD5" at 53.34,30.607 h1.2 r90
  text "PD6" at 55.88,30.607 h1.2 r90
  text "PD7" at 58.42,30.607 h1.2 r90

## Dimensions
0,0 to 97.544,0 on Mechanical 10
0,0 to 0,97.917 on Mechanical 10

## Text inside footprints (layer, text, board x,y; h text height)
AMS1117: Mechanical 1 "1" at 25.705,2.941 h1.2 r90; Mechanical 1 "2" at 25.705,5.146 h1.2 r90; Mechanical 1 "3" at 25.705,7.351 h1.2 r90
JTAG: Top Overlay "10" at 7.137,17.247 h1.52 r270; Top Overlay "9" at 7.112,20.955 h1.52 r270; Top Overlay "2" at 7.62,32.258 h1.52 r270; Top Overlay "1" at 4.584,31.604 h1.52 r270
LCD: Mechanical 1 "1" at 10.43,69.081 h1.2; Mechanical 1 "16" at 48.13,69.081 h1.2
RS232: Top Overlay "6" at 90.297,50.087 h1.02 r270; Top Overlay "9" at 90.043,58.596 h1.02 r270; Top Overlay "5" at 84.963,62.406 h1.02 r270; Top Overlay "1" at 85.09,46.277 h1.02 r270; Top Overlay "FEMALE" at 94.107,57.326 h1.52 r270